# Altium PCB Kilobot_Controller_PCB.PcbDoc
Units mm, origin at the board's own origin, x right, y up, seen from the top; angles counter-clockwise.
Board outline 86 x 86 mm, 2 copper layers (Top Layer, Bottom Layer); 142 components, 92 nets, 429 pads, 149 vias.
Unrouted connection lines stored in the file: 1.
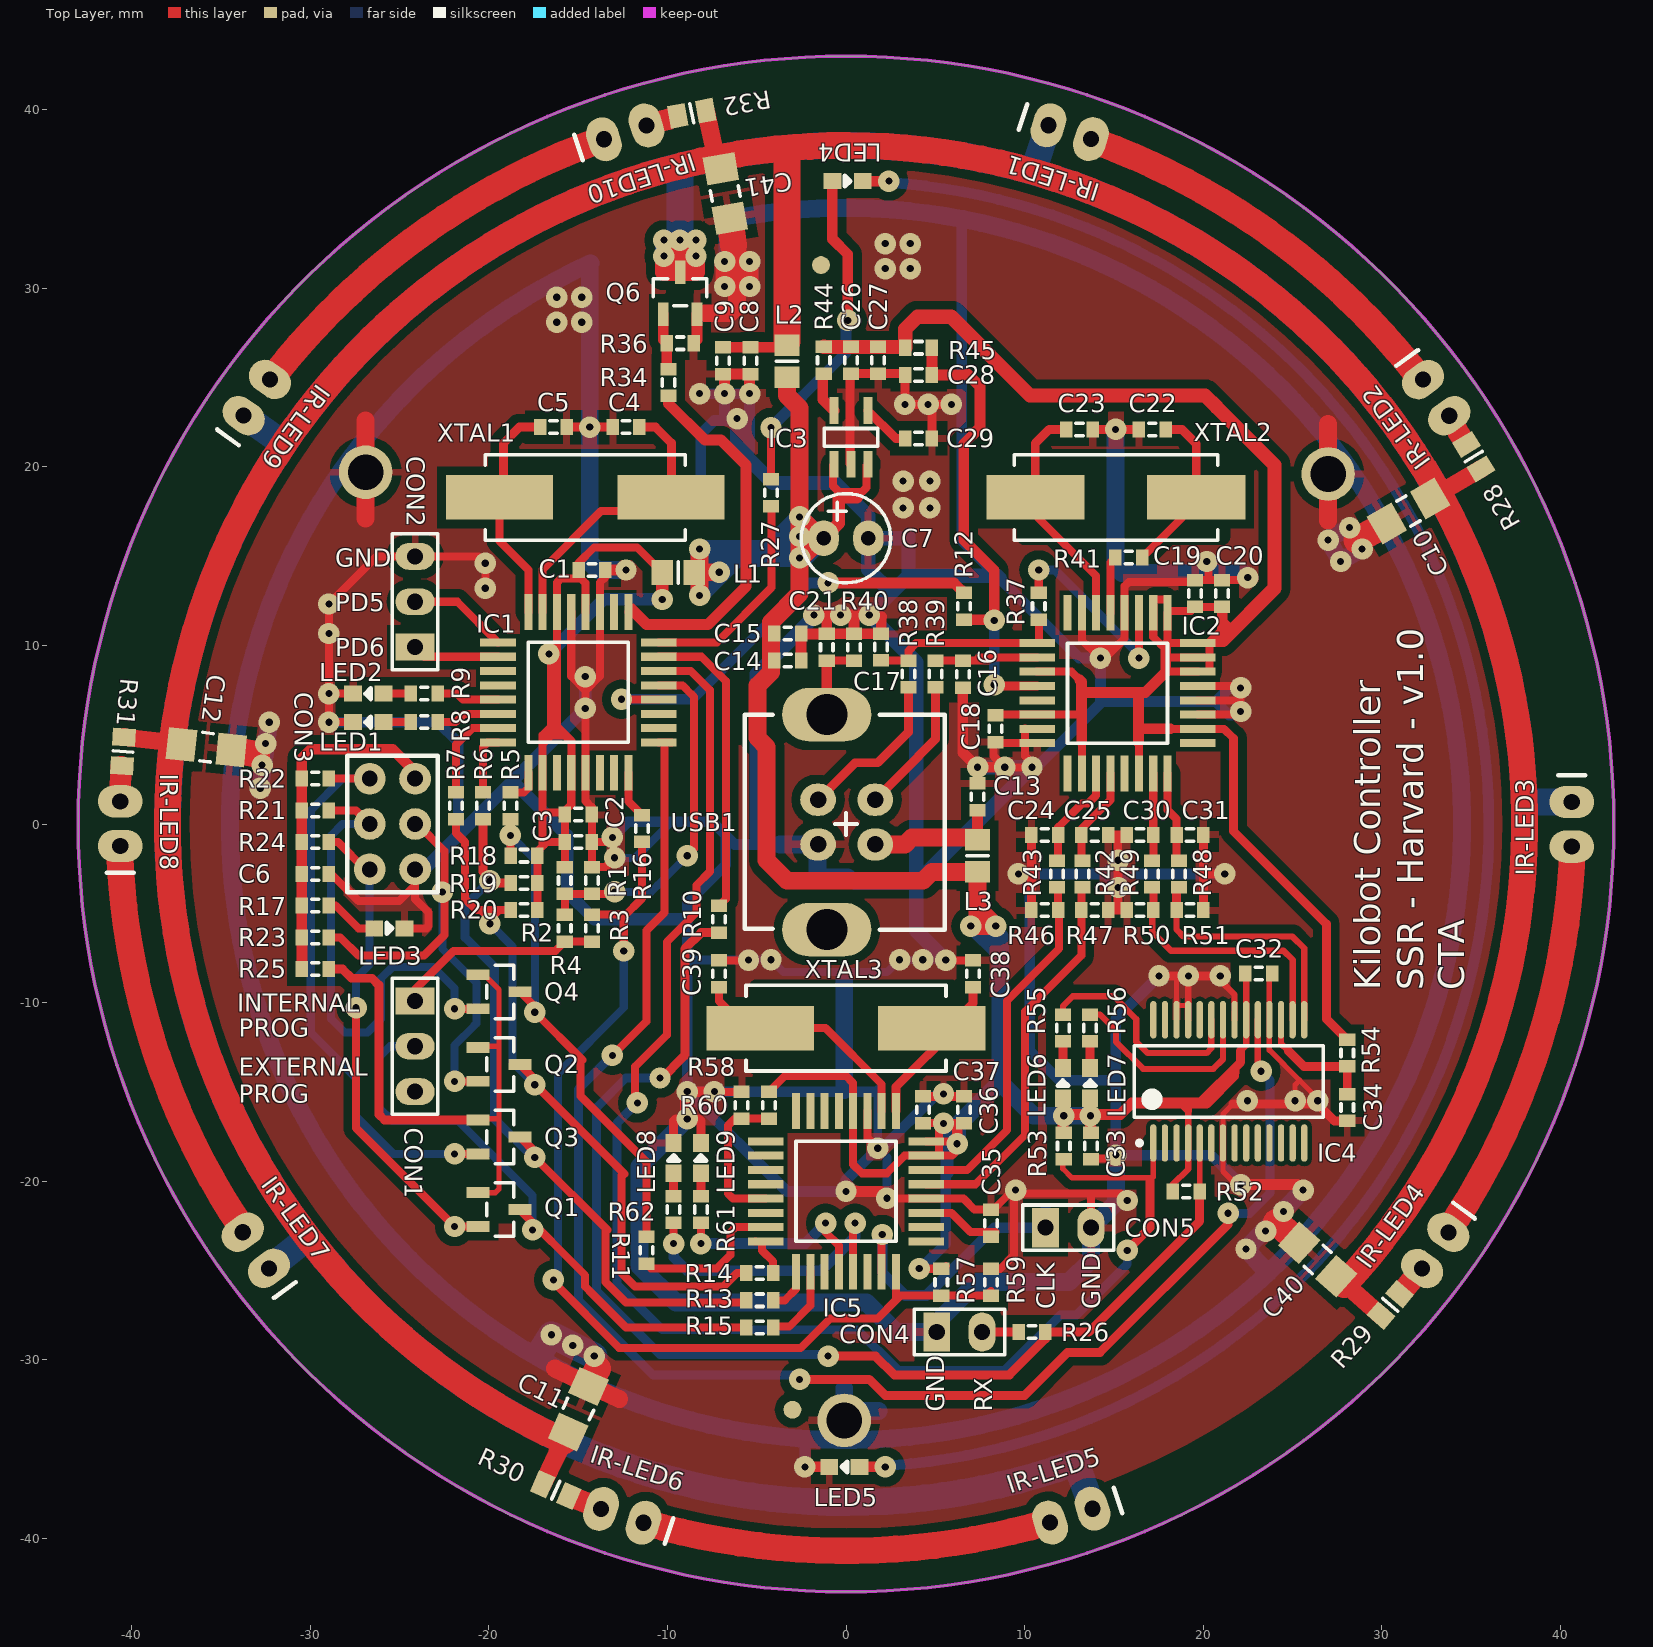
[diagram p0: Top Layer view]
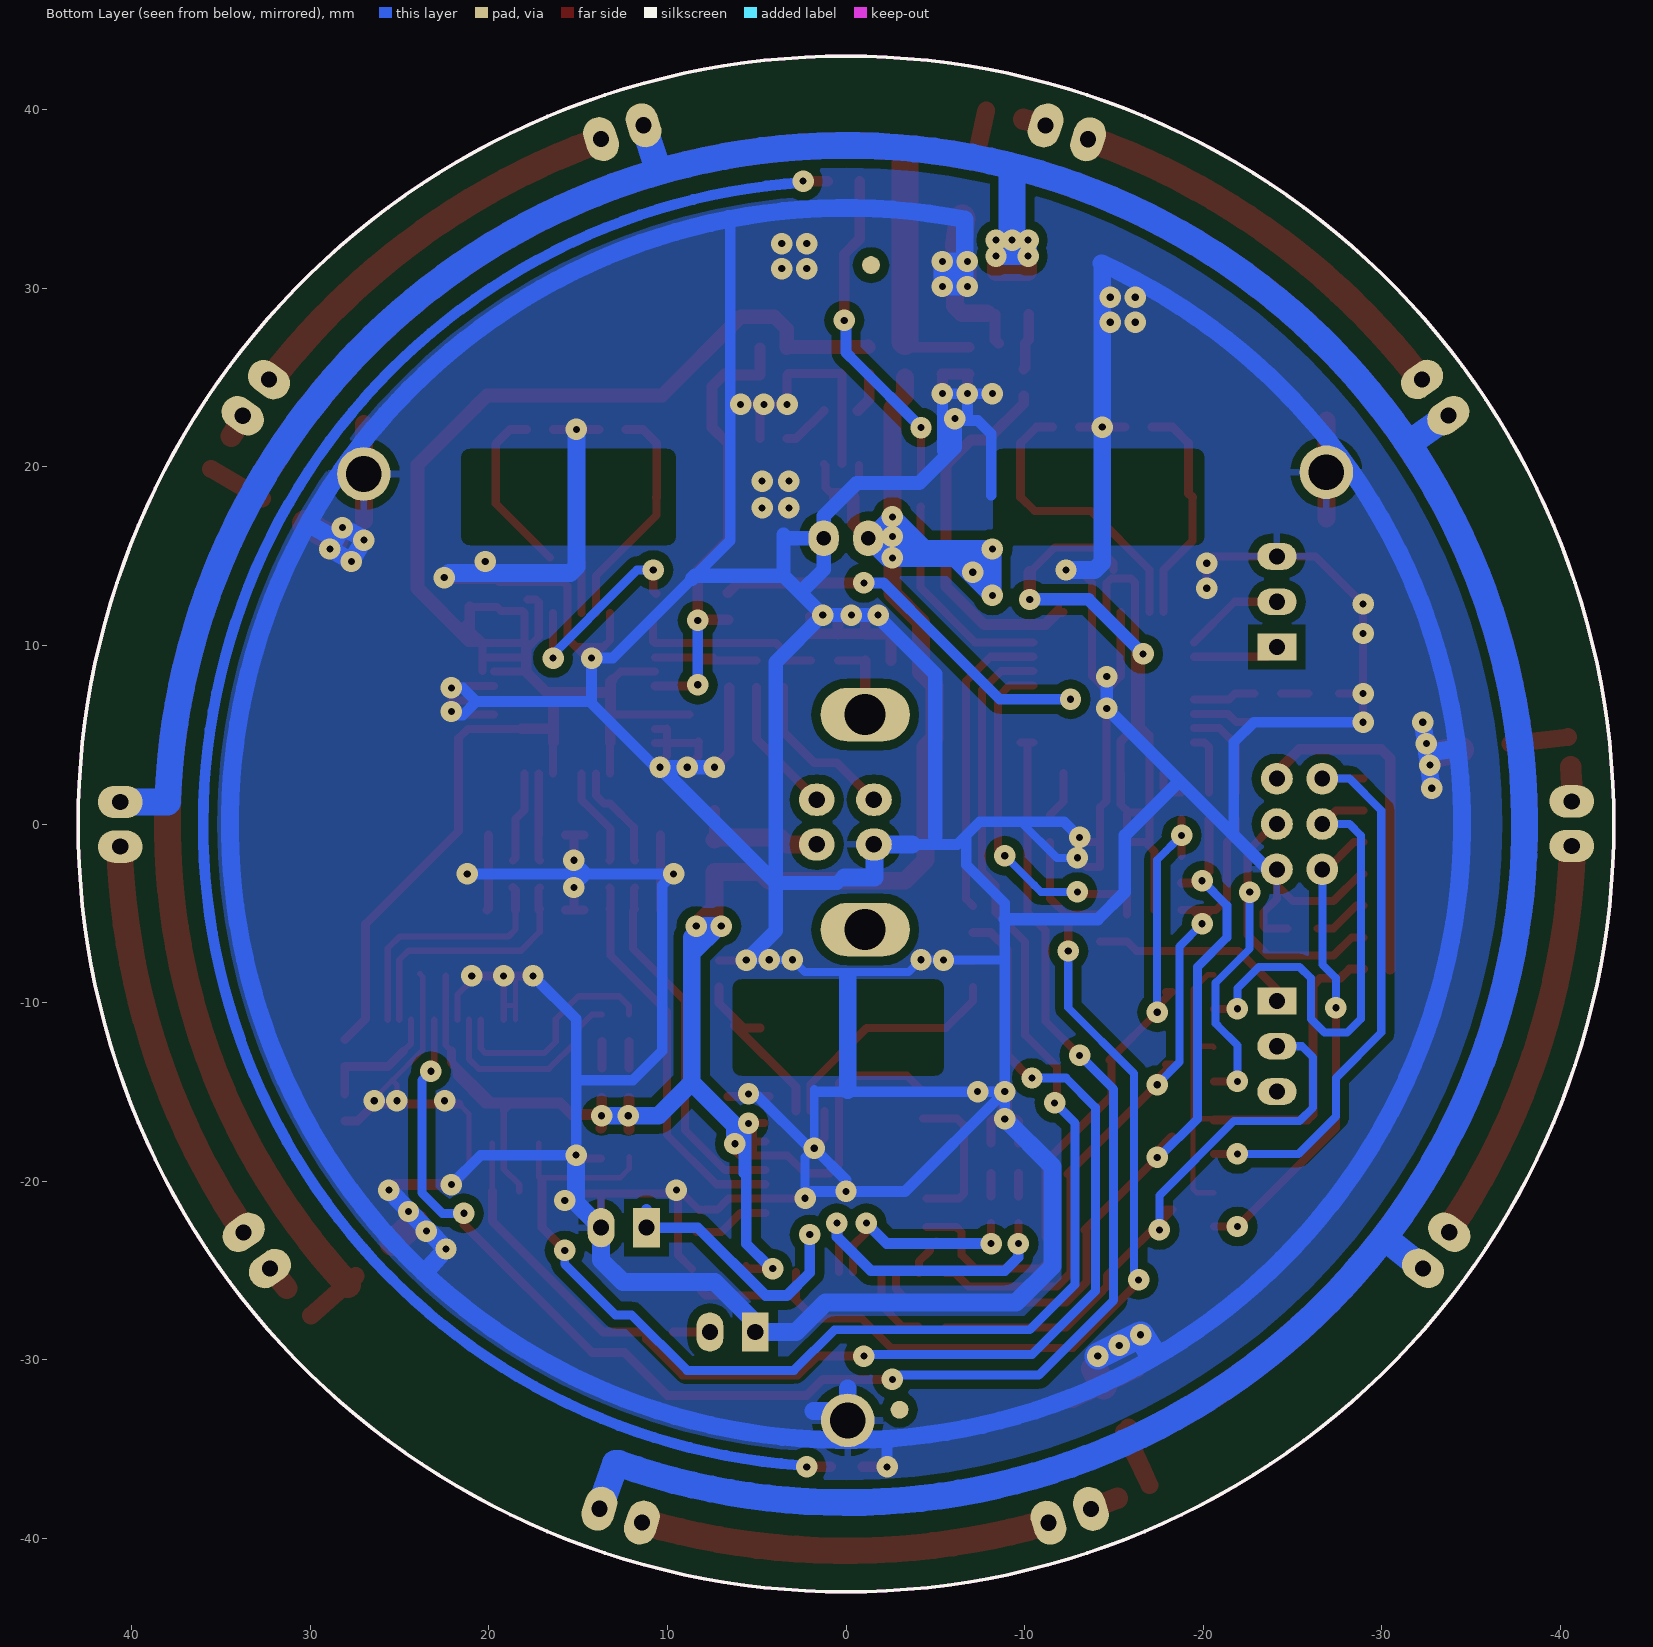
[diagram p1: Bottom Layer view, seen from below]

## Layer stack, top to bottom
Top Layer: signal copper 0.0356
Dielectric: dielectric 0.32, FR-4, Dk 4.8
Bottom Layer: signal copper 0.0356

## Board outline
-43,0 ccw(c0,0) 0,-43 ccw(c0,0) 43,0 ccw(c0,0) 0,43 ccw(c0,0)

## Design rules (kind name [scope] priority, off if disabled: settings)
Clearance ICs [(InComponent('IC1')) or (InComponent('IC2')) or (InComponent('IC3')) or (InComponent('IC4')) or (InComponent('IC5'))] p1: gap=0.25
Clearance [All] p2: gap=0.3
ComponentClearance [All] p1: gap=0 collisioncheckmode=3 verticalgap=0 showdistances=FALSE
MinimumSolderMaskSliver [All] p1: minsoldermaskwidth=0.05
PlaneConnect [All] p1: planeconnectstyle=Relief reliefexpansion=0.508 reliefentries=4 reliefconductorwidth=0.4 reliefairgap=0.254
PolygonConnect Via [IsVia] p1: connectstyle=Direct reliefconductorwidth=0.254 reliefentries=4 polygonreliefangle="90 Angle"
PolygonConnect [All] p2: connectstyle=Relief reliefconductorwidth=0.4 reliefentries=4 polygonreliefangle="90 Angle"
RoutingVias [All] p1: holewidth=0.5 width=1.27 viastyle="Through Hole" minholewidth=0.5 minwidth=1.27 maxholewidth=0.5 maxwidth=1.27
SilkToSilkClearance [All] p1: silktosilkclearance=0
SilkscreenOverComponentPads [All] p1: minsilkscreentomaskgap=0
SolderMaskExpansion Via_1 [IsVia] p1: expansion=-0.75
SolderMaskExpansion [All] p2: expansion=0.102
Width [All] p1: maxlimit=4 minlimit=0.254 preferedwidth=0.3
23 further rules are at their usual default settings.

## Classes and differential pairs
component class Kilobot_Controller_CPU: C1 C2 C3 C4 C5 C6 CON1 CON2 CON3 CON4 IC1 L1 LED1 LED2 LED3 Q1 Q2 Q3 Q4 R1 R2 R3 R4 R5 R6 R7 R8 R9 R10 R11 R12 R13 R14 R15 R16 R17 R18 R19 R20 R21 R22 R23 R24 R25 R26 XTAL1
component class Kilobot_Controller_Hub&FTDI: C13 C14 C15 C16 C17 C18 C19 C20 C21 C22 C23 C24 C25 C26 C27 C28 C29 C30 C31 C32 C33 C34 IC2 IC3 IC4 L3 L4 LED6 LED7 R37 R38 R39 R40 R41 R42 R43 R44 R45 R46 R47 R48 R49 R50 R51 R52 R53 R54 R55 R56 USB1 XTAL2
component class Kilobot_Controller_IR: C7 C8 C9 C10 C11 C12 C40 C41 IR-LED1 IR-LED2 IR-LED3 IR-LED4 IR-LED5 IR-LED6 IR-LED7 IR-LED8 IR-LED9 IR-LED10 L2 LED4 LED5 Q6 R26 R27 R29 R30 R31 R32 R34 R36
component class Kilobot_Controller_ISP: C35 C36 C37 C38 C39 CON5 IC5 LED8 LED9 R57 R58 R59 R60 R61 R62 XTAL3

## Components (designator, comment, footprint, x,y, rotation, side; value= is the part's Value field where it differs from the comment)
C1 "C0603" RESC1608L -14.224,14.224 r0 top
C2 "C0603" RESC1608L -14.986,0.52 r0 top
C3 "C0603" RESC1608L -14.986,-1.004 r180 top
C4 "C0603" RESC1608L -12.319,22.225 r0 top
C5 "C0603" RESC1608L -16.383,22.225 r180 top
C6 "C0603" RESC1608L -29.718,-2.794 r0 top
C7 "Aluminum" cap5mm 0,16.002 r0 top
C8 "C0603" RESC1608L -5.358,25.944 r270 top
C9 "C0603" RESC1608L -6.882,25.944 r90 top
C10 "Ceramic" 8RB-1206 31.496,17.526 r30 top
C11 "Ceramic" 8RB-1206 -14.986,-32.766 r246 top
C12 "Ceramic" 8RB-1206 -35.814,4.3 r174 top
C13 "C0603" RESC1608L 7.366,1.524 r270 top
C14 "C0603" RESC1608L -3.264,9.144 r0 top
C15 "C0603" RESC1608L -3.264,10.668 r180 top
C16 "C0603" RESC1608L 6.542,8.382 r90 top
C17 "C0603" RESC1608L 1.97,9.906 r270 top
C18 "C0603" RESC1608L 8.382,5.334 r90 top
C19 "C0603" RESC1608L 19.543,12.912 r270 top
C20 "C0603" RESC1608L 21.067,12.912 r270 top
C21 "C0603" RESC1608L -1.078,9.894 r90 top
C22 "C0603" RESC1608L 17.145,22.098 r0 top
C23 "C0603" RESC1608L 13.081,22.098 r180 top
C24 "C0603" RESC1608L 11.133,-0.604 r0 top
C25 "C0603" RESC1608L 13.927,-0.604 r180 top
C26 "C0603" RESC1608L 0.278,25.966 r90 top
C27 "C0603" RESC1608L 1.802,25.966 r90 top
C28 "C0603" RESC1608L 4.064,25.146 r0 top
C29 "C0603" RESC1608L 4.064,21.59 r0 top
C30 "C0603" RESC1608L 16.467,-0.604 r0 top
C31 "C0603" RESC1608L 19.261,-0.604 r180 top
C32 "C0603" RESC1608L 23.114,-8.382 r0 top
C33 "C0603" RESC1608L 13.716,-18.034 r90 top
C34 "C0603" RESC1608L 28.067,-15.875 r270 top
C35 "C0603" RESC1608L 8.128,-22.352 r270 top
C36 "C0603" RESC1608L 6.604,-16.002 r90 top
C37 "C0603" RESC1608L 4.318,-16.002 r270 top
C38 "C0603" RESC1608L 7.112,-8.382 r270 top
C39 "C0603" RESC1608L -7.112,-8.382 r270 top
C40 "Ceramic" 8RB-1206 26.416,-24.384 r318 top
C41 "Ceramic" 8RB-1206 -6.758,35.306 r100 top
CON1 "Jumper3" HDR1X3 -24.13,-9.906 r270 top
CON2 "Free pins" HDR1X3 -24.13,9.906 r90 top
CON3 "Rescue programming of kilobots" Programming -26.67,-2.54 r90 top
CON4 "Kilobot_Debug_Header" HDR1X2 5.08,-28.448 r0 top
CON5 "Header 2" HDR1X2 11.176,-22.606 r0 top
IC1 "Atmega328-SMD" TQFP32 -14.986,7.366 r270 top
IC2 "TUSB2036" TQFP32 15.205,7.328 r0 top
IC3 "TC2185" SOT23-5 0.278,21.648 r0 top
IC4 "IC_FT232RL" SSOP-28 21.435,-14.413 r90 top
IC5 "AT90USB162" TQFP32 0,-20.574 r270 top
IR-LED1 "IR-LED" IR-LED 13.716,38.354 r162 top
IR-LED2 "IR-LED" IR-LED 33.782,22.86 r126 top
IR-LED3 "IR-LED" IR-LED 40.64,-1.27 r90 top
IR-LED4 "IR-LED" IR-LED 32.258,-24.892 r54 top
IR-LED5 "IR-LED" IR-LED 11.43,-39.116 r18 top
IR-LED6 "IR-LED" IR-LED -13.716,-38.354 r342 top
IR-LED7 "IR-LED" IR-LED -33.782,-22.86 r306 top
IR-LED8 "IR-LED" IR-LED -40.64,1.27 r270 top
IR-LED9 "IR-LED" IR-LED -32.258,24.892 r234 top
IR-LED10 "IR-LED" IR-LED -11.176,39.116 r198 top
L1 "Ferrit" RESC2012N -9.398,14.097 r0 top
L2 "Ferrit" RESC2012N -3.302,25.908 r90 top
L3 "Ferrit" RESC2012N 7.366,-1.778 r270 top
LED1 "LED" LED0603 -25.908,5.7 r180 top
LED2 "LED" LED0603 -25.908,7.3 r180 top
LED3 "LED" LED0603 -26.416,-5.842 r0 top
LED4 "LED" LED0603 -0.762,36 r0 top
LED5 "LED" LED0603 0.762,-36 r180 top
LED6 "LED" LED0603 12.147,-15.361 r90 top
LED7 "LED" LED0603 13.671,-15.361 r90 top
LED8 "LED" LED0603 -9.652,-19.558 r90 top
LED9 "LED" LED0603 -8.128,-19.558 r90 top
Q1 "NMOS23" sot23-3 -19.431,-21.59 r0 top
Q2 "NMOS23" sot23-3 -19.431,-13.462 r0 top
Q3 "NMOS23" sot23-3 -19.431,-17.526 r0 top
Q4 "NMOS23" sot23-3 -19.431,-9.398 r0 top
Q6 "NMOS23" sot23-3 -9.288,29.716 r90 top
R1 "Res1" RESC1608L -14.224,-3.163 r90 top
R2 "Res1" RESC1608L -15.748,-3.163 r270 top
R3 "Res1" RESC1608L -14.224,-5.83 r90 top
R4 "Res1" RESC1608L -15.748,-5.83 r270 top
R5 "Res1" RESC1608L -18.796,1.016 r270 top
R6 "Res1" RESC1608L -20.32,1.016 r270 top
R7 "Res1" RESC1608L -21.844,1.016 r270 top
R8 "Res1" RESC1608L -23.622,5.7 r0 top
R9 "Res1" RESC1608L -23.622,7.3 r0 top
R10 "Res1" RESC1608L -7.112,-5.334 r270 top
R11 "Res1" RESC1608L -11.176,-23.876 r270 top
R12 "Res1" RESC1608L 6.604,12.192 r270 top
R13 "Res1" RESC1608L -4.826,-26.67 r0 top
R14 "Res1" RESC1608L -4.826,-25.146 r0 top
R15 "Res1" RESC1608L -4.826,-28.194 r0 top
R16 "Res1" RESC1608L -11.43,-0.254 r270 top
R17 "Res1" RESC1608L -29.718,-4.572 r0 top
R18 "Res1" RESC1608L -18.034,-1.778 r0 top
R19 "Res1" RESC1608L -18.034,-3.302 r0 top
R20 "Res1" RESC1608L -18.034,-4.826 r0 top
R21 "Res1" RESC1608L -29.718,0.762 r180 top
R22 "Res1" RESC1608L -29.718,2.54 r180 top
R23 "Res1" RESC1608L -29.718,-6.35 r180 top
R24 "Res1" RESC1608L -29.718,-1.016 r180 top
R25 "Res1" RESC1608L -29.718,-8.128 r0 top
R26 "Res1" RESC1608L 10.414,-28.448 r0 top
R27 "Res1" RESC1608L -4.2,18.542 r270 top
R28 "Res1" RESC2012L 35.152,20.574 r301 top
R29 "Res1" RESC2012L 30.48,-26.924 r229 top
R30 "Res1" RESC2012L -16.256,-37.3 r156 top
R31 "Res1" RESC2012L -40.486,4.064 r86 top
R32 "Res1" RESC2012L -8.636,39.8 r11 top
R34 "Res1" RESC1608L -9.95,24.724 r270 top
R36 "Res1" RESC1608L -9.288,26.922 r180 top
R37 "Res1" RESC1608L 10.795,12.192 r270 top
R38 "Res1" RESC1608L 3.494,8.394 r270 top
R39 "Res1" RESC1608L 5.018,8.394 r270 top
R40 "Res1" RESC1608L 0.446,9.894 r90 top
R41 "Res1" RESC1608L 15.835,14.922 r0 top
R42 "Res1" RESC1608L 13.247,-2.794 r90 top
R43 "Res1" RESC1608L 11.811,-2.794 r90 top
R44 "Res1" RESC1608L -1.246,25.966 r270 top
R45 "Res1" RESC1608L 4.064,26.67 r180 top
R46 "Res1" RESC1608L 11.133,-4.826 r180 top
R47 "Res1" RESC1608L 13.927,-4.826 r0 top
R48 "Res1" RESC1608L 18.647,-2.794 r90 top
R49 "Res1" RESC1608L 17.145,-2.794 r90 top
R50 "Res1" RESC1608L 16.467,-4.826 r180 top
R51 "Res1" RESC1608L 19.261,-4.826 r0 top
R52 "Res1" RESC1608L 19.05,-20.574 r180 top
R53 "Res1" RESC1608L 12.192,-18.034 r90 top
R54 "Res1" RESC1608L 28.067,-12.827 r90 top
R55 "Res1" RESC1608L 12.147,-11.424 r270 top
R56 "Res1" RESC1608L 13.671,-11.424 r270 top
R57 "Res1" RESC1608L 5.334,-25.654 r270 top
R58 "Res1" RESC1608L -4.318,-15.748 r270 top
R59 "Res1" RESC1608L 8.128,-25.654 r90 top
R60 "Res1" RESC1608L -5.842,-15.748 r90 top
R61 "Res1" RESC1608L -8.128,-21.59 r270 top
R62 "Res1" RESC1608L -9.652,-21.59 r270 top
USB1 "USB" USB_VERTICAL 0.635,0.127 r0 top
XTAL1 "Crystal" crystal-hc49 -14.605,18.288 r0 top
XTAL2 "CrystalSMD" CrystalSMD 15.113,18.288 r0 top
XTAL3 "Crystal" crystal-hc49 0,-11.43 r0 top

## Footprints (in the part's own frame and the unit in brackets; to place one, negate y for a bottom-side part, rotate by r counter-clockwise, add the part's x,y. Pads: shape width x height; smd on the part's side, far side on the other; paste and mask are expansions set on the pad)
8RB-1206 [mm] "Chip Resistor; Body 3.2 x 1.6 mm (LxW typ)"
  rect 1.6x1.8 smd: 1(-1.4,0) 2(1.4,0)
  silkscreen extent -0.3,-0.8 0.3,0.8
cap5mm [mm]
  oval 1.7x2 hole 0.8: 1(-1.25,0) 2(1.25,0)
  silkscreen extent -2.5,-2.5 2.5,2.5
crystal-hc49 [mm]
  rect 6x2.5 smd: 1(-4.8,0) 2(4.8,0)
  silkscreen extent -5.6,-2.4 5.6,2.4
CrystalSMD [mm]
  rect 5.5x2.5 smd: 1(-4.5,0) 2(4.5,0)
  silkscreen extent -5.7,-2.4 5.7,2.4
HDR1X2 [mm] "Connector; Header; 2 Position"
  rect 1.5x2.2 hole 0.9: 1(0,0)
  oval 1.5x2.2 hole 0.9: 2(2.54,0)
  silkscreen extent -1.27,-1.27 3.81,1.27
HDR1X3 [mm] "Connector; Header; 3 Position"
  rect 1.5x2.2 hole 0.9: 1(0,0)
  oval 1.5x2.2 hole 0.9: 2(2.54,0) 3(5.08,0)
  silkscreen extent -1.27,-1.27 6.35,1.27
IR-LED [mm]
  oval 1.8x2.5 hole 0.9: 1(0,0) 2(2.5,0)
  silkscreen extent 4,-0.75 4,0.75
LED0603 [mm]
  rect 1x0.9 smd: 1(0,0) 2(1.7,0)
  silkscreen extent 0.7,-0.3 1,0.3
Programming [mil]
  round 70 hole 35: 1(0,0) 2(100,0) 3(200,0) 4(200,-100) 5(100,-100) 6(0,-100)
  silkscreen extent -50,-150 250,50
RESC1608L [mm] "Chip Resistor, Body 1.6x0.8mm, IPC High Density"
  rect 0.7x0.9 smd: 1(-0.75,0) 2(0.75,0)
  silkscreen extent -0.2,-0.35 0.2,0.35, body extent -0.85,-0.48 0.85,0.48, height 0.9
RESC2012L [mm] "Chip Resistor, Body 2.0x1.3mm, IPC High Density"
  rect 1x1.3 smd: 1(-0.8,0) 2(0.8,0)
  silkscreen extent 0,-0.55 0,0.55, body extent -1.07,-0.7 1.07,0.7, height 2.54
RESC2012N [mm] "Chip Resistor, Body 2.0x1.2mm, IPC Medium Density"
  rect 1.2x1.4 smd: 1(-0.9,0) 2(0.9,0)
  silkscreen extent 0,-0.6 0,0.6, body extent -1.07,-0.7 1.07,0.7, height 0.7
sot23-3 [mm]
  rect 1.3x0.6 smd: 1(-1.173,0.95) 2(-1.173,-0.95) 3(1.177,0)
  silkscreen extent -0.7,-1.5 0.83,1.5
SOT23-5 [mm]
  rect 0.5x1.5 smd: 1(-0.95,-1.5) 2(0,-1.5) 3(0.95,-1.5) 4(0.95,1.5) 5(-0.95,1.5)
  silkscreen extent -1.5,-0.5 1.5,0.5
SSOP-28 [mm] "28-Pin SSOP 0.65 mm Pitch"
  oval 2.1x0.35 smd: 1(-3.45,4.225) 2(-3.45,3.575) 3(-3.45,2.925) 4(-3.45,2.275) 5(-3.45,1.625) 6(-3.45,0.975) 7(-3.45,0.325) 8(-3.45,-0.325) 9(-3.45,-0.975) 10(-3.45,-1.625) 11(-3.45,-2.275) 12(-3.45,-2.925) 13(-3.45,-3.575) 14(-3.45,-4.225) 15(3.45,-4.225) 16(3.45,-3.575) 17(3.45,-2.925) 18(3.45,-2.275) 19(3.45,-1.625) 20(3.45,-0.975) 21(3.45,-0.325) 22(3.45,0.325) 23(3.45,0.975) 24(3.45,1.625) 25(3.45,2.275) 26(3.45,2.925) 27(3.45,3.575) 28(3.45,4.225)
  silkscreen extent -3.57,-5.3 2,5.3, body extent -2.7,-5.3 2.7,5.3, height 2
TQFP32 [mm]
  rect 2x0.45 smd: 1(-4.5,2.8) 2(-4.5,2) 3(-4.5,1.2) 4(-4.5,0.4) 5(-4.5,-0.4) 6(-4.5,-1.2) 7(-4.5,-2) 8(-4.5,-2.8) 17(4.5,-2.8) 18(4.5,-2) 19(4.5,-1.2) 20(4.5,-0.4) 21(4.5,0.4) 22(4.5,1.2) 23(4.5,2) 24(4.5,2.8)
  rect 0.45x2 smd: 9(-2.8,-4.5) 10(-2,-4.5) 11(-1.2,-4.5) 12(-0.4,-4.5) 13(0.4,-4.5) 14(1.2,-4.5) 15(2,-4.5) 16(2.8,-4.5) 25(2.8,4.5) 26(2,4.5) 27(1.2,4.5) 28(0.4,4.5) 29(-0.4,4.5) 30(-1.2,4.5) 31(-2,4.5) 32(-2.8,4.5)
  round 1 on Top Overlay: 33(-2,2)
  silkscreen extent -2.8,-2.8 2.8,2.8
USB_VERTICAL [mm]
  oval 2x1.8 hole 0.92: 1(1,-1.27) 2(1,1.23) 3(-2.2,1.23) 4(-2.2,-1.27)
  oval 5x3 hole 2.3: 5(-1.71,-6.04) 5(-1.71,6)
  silkscreen extent -6.31,-6.04 4.89,6

## Part data
C1 C2 C3 C4 C5 C6 C8 C9 C13 C14 C15 C16 C17 C18 C19 C20 C21 C22 C23 C24 C25 C26 C27 C28 C29 C30 C31 C32 C33 C34 C35 C36 C37 C38 C39: "Ceramic Chip Capacitor - Standard"
C7: library part CAP
C10 C11 C12 C40 C41: library part CAP2220
CON2: library part "Header 3", "Header, 3-Pin"
CON3: library part "Programming con new symbol"
CON5: "Header, 2-Pin"
IC4: "FT232R USB UART"
L1 L2 L3: library part Inductor, "Inductor"
R1 R2 R3 R4 R5 R6 R7 R8 R9 R10 R11 R12 R13 R14 R15 R16 R17 R18 R19 R20 R21 R22 R23 R24 R25 R26 R27 R28 R29 R30 R31 R32 R34 R36 R37 R38 R39 R40 R41 R42 R43 R44 R45 R46 R47 R48 R49 R50 R51 R52 R53 R54 R55 R56 R57 R58 R59 R60 R61 R62: "Resistor"

## Free pads (board coordinates)
  round 1 on Top Overlay: 0(-26.67,-4.699)
  round 2 on Top Solder: 0(-3,-32.8) 0(-1.4,31.3)
  round 1 all layers, no hole: 3(-3,-32.8) 3(-1.4,31.3)
  round 3 hole 2: 24(-26.9,19.7) 24(-0.1,-33.4) 24(27,19.6)

## Via types
v1: diameter 1.2, hole 0.4, Top Layer to Bottom Layer, 149 vias

## Nets (pads, with @x,y where several pads share a name; then routed paths per layer and width w, separated by ;. In a path a pad name is that pad's centre, name@x,y a point inside that pad or via, vN(x,y) a via of type N, cw(c..) or ccw(c..) an arc to the next point about the centre after c; other vN are vias at no path point)
+3V3: C18.2 C19.2 C20.2 C26.2 C27.2 IC2.3 IC2.6 IC2.10 IC2.14 IC2.18 IC2.22 IC2.23 IC2.24 IC2.25 IC2.26 R44.1 R45.2 R54.2 | length 115.3
  Top Layer w0.45: C18.2@8.763,6.128 IC2.6 13.097,6.128 13.097,7.366 ; IC2.3 12.629,8.528 13.097,8.06 13.097,7.366 ; IC2.10 13.205,4.569 13.208,4.572 ; 13.335,7.366 13.097,7.366 ; 16.383,4.572 16.405,4.55 IC2.14 ; IC2.25@17.847,12.56 17.347,12.56 17.205,12.418 IC2.26 17.205,10.481 17.653,10.033 17.907,10.033 ; 17.907,8.509 17.926,8.528 IC2.22 ; 17.907,9.398 17.977,9.328 IC2.23 20.329,9.328 IC2.23@20.347,9.31 ; 18.161,5.334 18.167,5.328 IC2.18 21.172,5.328 21.7,4.8 ; IC2.22@20.347,8.56 20.347,10.128 IC2.24 ; 20.847,10.31 20.665,10.128 IC2.24 ; 21.067,10.9 20.295,10.128 IC2.24 ; C20.2 C19.2 19.319,11.938 18.115,11.938 IC2.25 18.005,10.131 17.907,10.033 ; 17.907,10.033 18.002,10.128 IC2.24
  Top Layer w0.5: 21.7,4.8 21.7,-0.4 26.9,-5.6 26.9,-10.91 R54.2
  Top Layer w0.6: 13.097,8.06 13.208,7.949 13.208,4.572 ; 13.335,7.366 16.383,7.366 ; 16.383,4.572 16.383,5.461 ; 17.907,10.033 17.907,8.509 16.764,7.366 16.383,7.366 ; 18.161,5.334 16.51,5.334 16.383,5.461 ; 20.847,10.31 21.067,10.53 21.067,11.333 ; C20.2 21.067,11.333 ; 21.6,10.8 21.067,11.333 ; 16.383,5.461 16.383,7.366
  Top Layer w0.8: R44.1@-1.234,26.728 R44.1 3.268,26.716 R45.2 3.314,27.714 4,28.4 5.9,28.4 10.3,24 20.1,24 ; 20.768,23.332 20.1,24 ; 20.847,10.31 21.11,10.31 24,13.2 24,20.1 20.1,24
CPU_MISO: IC5.17 R13.2 | length 2.5
  Top Layer w0.45: R13.2 -3.429,-26.67 -2.8,-26.041 IC5.17
CPU_MOSI: IC5.16 R14.2 | length 1.8
  Top Layer w0.45: IC5.16@-5.08,-23.368 IC5.16@-5.074,-23.374 ; -4.699,-23.622 -4.699,-23.876 -4.076,-24.499 R14.2
CPU_RESET: IC5.18 R15.2 | length 4.5
  Top Layer w0.45: R15.2 -4.032,-28.15 -3.182,-28.15 -2,-26.968 IC5.18
CPU_SCK: IC5.15 R11.2 | length 8.5
  Top Layer w0.45: R11.2 -10.91,-24.892 -7.239,-24.892 -6.477,-24.13 -6.477,-22.86 -6.191,-22.574 IC5.15
DEBUG_1: IC1.14 R8.2 | length 3.6
  Top Layer w0.45: R8.2 -21.859,5.7 -21.393,6.166 -21.139,6.166 IC1.14
DEBUG_2: IC1.13 R9.2 | length 3.5
  Top Layer w0.45: R9.2 -21.778,7.3 -21.444,6.966 IC1.13
DM1: IC5.30 R43.1 R46.1 | length 20.4
  Top Layer w0.45: IC5.30 6.788,-19.374 9.017,-17.145 9.017,-9.9 11.938,-6.979 11.938,-5.842 11.938,-4.881 R46.1@11.811,-4.754 ; R43.1 11.883,-3.616 R46.1
DM2: IC4.16 R49.1 R50.1 | length 14.6
  Top Layer w0.35: R50.1@17.145,-4.754 17.145,-6.045 18.2,-7.1 24.5,-7.1 25.01,-7.61 IC4.16
  Top Layer w0.45: R50.1@17.145,-4.754 R50.1 17.217,-3.616 R49.1
DP1: IC5.29 R42.1 R47.1 | length 22
  Top Layer w0.45: IC5.29 7.258,-20.174 10.033,-17.399 10.033,-10.5 13.177,-7.356 13.177,-5.938 R47.1 ; R47.1@13.247,-4.756 R47.1 ; R42.1 13.177,-3.614 R47.1
DP2: IC4.15 R48.1 R51.1 | length 14
  Top Layer w0.35: R51.1 18.511,-5.911 18.9,-6.3 25,-6.3 25.66,-6.96 IC4.15
  Top Layer w0.5: R51.1 18.511,-3.68 R48.1
GND: C1.2 C2.2 C3.1 C4.1 C5.1 C6.2 C7.2 C8.2 C9.1 C10.1 C11.1 C12.1 C13.1 C14.2 C15.1 C16.1 C17.1 C18.1 C19.1 C20.1 C21.2 C22.1 C23.1 C24.1 C25.1 C26.1 C27.1 C28.1 C29.2 C30.1 C31.1 C32.2 C33.1 C34.2 C35.1 C36.2 C37.1 C38.1 C39.1 C40.1 C41.1 CON2.3 CON3.6 CON4.1 CON5.2 IC1.3 IC1.5 IC1.21 IC2.7 IC2.8 IC2.19 IC2.20 IC2.21 IC2.28 IC2.31 IC3.2 IC4.7 IC4.18 IC4.21 IC4.25 IC4.26 IC5.3 IC5.28 LED1.2 LED2.2 LED3.2 LED5.2 LED8.2 LED9.2 pad.24 Q6.2 R1.2 R36.1 R40.2 R46.2 R47.2 R50.2 R51.2 R59.2 R60.2 USB1.4 | length 965.4
  Top Layer w0.3: v1(17.526,-8.509) 18.542,-8.509 18.51,-8.541 IC4.26 18.51,-10.192 18.542,-10.16 19.177,-10.16 19.16,-10.177 IC4.25 ; 21.657,-15.685 21.11,-16.232 IC4.7 21.11,-19.459 21.844,-20.193 v1(22.098,-20.193) ; C32.2@23.749,-8.497 C32.2 23.71,-8.536 IC4.18 23.71,-12.661 25.4,-14.351 ; v1@25.146,-15.685 25.146,-14.605 25.4,-14.351 ; v1@26.407,-15.685 26.407,-15.358 25.4,-14.351
  Top Layer w0.35: IC4.25 19.16,-8.526 v1(19.177,-8.509) ; v1(20.955,-8.509) 20.955,-8.763 21.76,-9.568 IC4.21
  Top Layer w0.45: C6.2 -28.829,-2.794 -27.305,-4.318 -25.019,-4.318 -24.13,-3.429 CON3.6 -24.13,-4.191 -23.368,-4.953 -23.368,-5.715 -23.495,-5.842 LED3.2 ; v1(-28.956,7.3) LED2.2 ; LED1.2 v1(-28.956,5.7) v1(-28.956,12.319) -26.289,14.986 CON2.3 -20.586,14.986 v1(-20.2,14.6) v1(-20.2,13.2) ; IC1.5 -15.386,8.274 -14.586,7.474 ; C3.1 -13.335,-1.004 v1(-13.081,-0.75) ; C2.2@-14.236,0.901 C2.2 ; C1.2 -13.474,13.831 -13.786,13.519 IC1.3 -13.786,8.274 -14.586,7.474 ; v1(-12.954,-1.893) -13.474,-2.413 R1.2 -14.236,-2.401 C2.2 ; v1(-7.366,-14.986) -7.354,-14.998 R60.2 ; C39.1 -5.473,-7.632 v1(-5.461,-7.62) ; IC5.3 1.2,-17.583 v1(1.778,-18.161) ; v1(2.286,-20.955) 2.305,-20.974 IC5.28 6.574,-20.974 7.2,-21.6 C35.1@7.888,-21.6 ; v1(5.588,-7.62) 5.6,-7.632 C38.1 ; C35.1 8.243,-21.602 9.144,-20.701 15.367,-20.701 v1(15.748,-21.082) ; C18.1@8.255,4.584 8.255,3.81 v1(8.89,3.175) 10.668,3.175 10.033,3.81 10.033,5.334 10.039,5.328 IC2.7 ; C18.1@8.311,4.528 IC2.8 ; 8.636,-24.904 9.4,-24.14 9.4,-20.801 v1@9.5,-20.701 ; IC2.31 13.205,10.29 13.589,9.906 ; CON5.2 13.716,-20.701 ; C33.1@13.716,-18.73 15.101,-18.73 v1(15.113,-18.542) ; 14.732,9.906 14.732,9.779 v1(14.246,9.293) ; IC2.19 22.066,6.128 22.098,6.096 v1(22.098,7.62) 21.99,7.728 IC2.21 ; IC2.20 22.041,6.928 22.098,6.985 ; v1(20.2,14.7) 20.3,14.6 20.3,13.662 ; v1(22.5,13.8) 22.362,13.662 C20.1 20.3,13.662 ; -14.586,7.474 IC1.21 -14.586,1.289 -14.236,0.939 C2.2 ; 13.589,9.906 13.633,9.906 v1(14.246,9.293) ; 13.589,9.906 15.113,9.906 ; v1(14.246,9.293) 14.5,9.293 15.113,9.906 ; 15.113,9.906 15.605,10.398 IC2.28 15.605,13.318 15.847,13.56 19.441,13.56 C19.1 20.3,13.662
  Top Layer w0.5: C5.1 C4.1 ; LED8.2 -9.652,-16.637 -9.525,-16.51 v1(-8.89,-16.51) -8.255,-16.51 -8.128,-16.637 LED9.2 ; IC3.2@0.229,20.197 0.229,25.167 C26.1 3.244,25.216 C28.1 3.3,25.132 v1(3.3,23.5) v1(5.9,23.5) ; C37.1 C36.2 ; v1(4.6,23.5) 4.814,23.286 C29.2 ; C18.1@8.255,4.584 C18.1@8.311,4.528 ; v1(9.652,-2.794) 10.383,-2.794 ; R46.2 C24.1 ; C23.1 C22.1 ; R47.2 R50.2 ; C25.1 C30.1 ; 15.113,-4.826 15.24,-4.699 v1(15.24,-3.556) 15.24,-0.604 ; v1(17.526,-8.509) v1(20.955,-8.509) ; 20.011,-2.794 v1(21.209,-2.794) ; C31.1 20.011,-4.726 R51.2@20.111,-4.826 ; 21.657,-15.685 26.407,-15.685 27.347,-16.625 C34.2
  Top Layer w0.6: C1.2 v1(-12.319,14.224) ; v1(-8.89,-14.986) v1(-7.366,-14.986) ; R36.1 -8.338,27.122 Q6.2 -7.9,28.6 ; v1(-6.8,24.1) -6.8,25.112 C9.1 C8.2 -5.4,25.152 v1(-5.4,24.1) ; C14.2 C15.1 -2.49,10.644 C21.2 ; v1(-2.3,-36) LED5.2 ; v1(-1.8,11.7) -1,11.7 ; C21.2@-1.102,10.668 C21.2 ; C21.2@-1.1,10.666 C21.2 ; v1(0,-20.574) 1.905,-20.574 v1(2.286,-20.955) ; 0.4,11.7 0.446,11.654 R40.2 R40.2@0.5,10.698 ; C17.1@2,10.686 C17.1 ; C16.1 6.542,3.999 v1(7.366,3.175) v1(8.89,3.175) ; v1(20.955,-8.509) v1@20.955,-8.255 ; v1(22.098,-20.193) v1@25.273,-20.193 ; C21.2 -1.078,11.622 -1,11.7 ; C21.2 -1.066,10.656 C17.1 ; -1,11.7 v1(1.3,11.7) 1.4,11.6 2,11.6 1.97,11.57 C17.1
  Top Layer w0.8: v1(-8.89,-16.51) v1(-8.89,-14.986)
  Top Layer w1: -26.9,17.1 -26.9,22.6 ; -16.3,-30.5 -12.7,-32.2 ; -7.9,28.6 -6.5,28.6 -6.1,29 -6.1,31.8 v1(-5.4,31.5) v1(-5.4,30.1) v1(-6.8,30.1) v1(-6.8,31.5) ; 27,17 27,22.4
  Top Layer w1.5: C12.1 -33,3.9 ; C11.1 -13.9,-30.5 ; C41.1 -6.3,32.4 ; 24.1,-22.3 C40.1 ; v1@28.6,15.9 C10.1
  Bottom Layer w0.45: v1(-12.954,-1.893) -12.942,-1.905 -11.811,-1.905 -9.779,0.127 ; v1(-7.366,-14.986) 1.651,-14.986 1.778,-14.859 ; v1@-5.441,-7.6 v1(-4.2,-7.6) -3.5,-8.3 -0.1,-8.3 ; -2.3,-34.6 -2.2,-34.5 ; 0,-14.986 -0.1,-14.886 -0.1,-8.3 ; v1(5.588,-7.62) 3.02,-7.62 v1(3,-7.6) 2.3,-8.3 -0.1,-8.3
  Bottom Layer w0.5: -8.89,-7.62 v1(-5.461,-7.62) ; 1.778,-14.859 v1(1.778,-18.161) 2.286,-18.669 v1(2.286,-20.955) ; 15.097,17.81 v1(15.097,22.098) ; 18.847,14.06 22.24,14.06 v1(22.5,13.8)
  Bottom Layer w0.6: v1(-28.956,5.7) -22.845,5.7 -21.717,4.572 -21.717,-0.635 -21.981,-0.899 ; -14.351,16.256 v1(-14.351,22.225) ; v1(-13.081,-0.75) -12.204,0.127 -7.493,0.127 -6.731,-0.635 ; v1(-8.89,-16.51) v1(-8.89,-14.986) ; v1(-8.2,24.1) v1(-6.8,24.1) ; -8.128,18.415 -8.128,21.844 -7.372,22.6 v1@-6.1,22.6 ; -6.8,22.6 v1(-6.8,24.1) ; -5.65,20.65 -5.4,20.9 v1(-5.4,24.1) v1(-6.8,24.1) ; v1(-2.3,-36) -2.3,-34.6 ; USB1.4 -6.223,-1.143 -6.731,-0.635 ; 1.651,-14.986 v1(-8.89,-14.986) ; v1(2.286,-20.955) 1.905,-20.574 v1(0,-20.574) ; v1@4.953,-15.24 2.032,-18.161 v1(1.778,-18.161) 0,-19.939 v1(0,-20.574) ; 6.7,33.8 6.477,33.577 6.477,15.875 13.059,9.293 v1(14.246,9.293) 14.246,6.963 14.351,6.858 ; v1@10.668,3.175 14.351,6.858 ; 14.7,-2.9 14.7,-3.016 v1(15.24,-3.556) 15.24,-2.8 ; v1(15.748,-21.082) 15.113,-20.447 v1(15.113,-18.542) ; v1(17.526,-8.509) 15.113,-10.922 15.113,-14.224 ; v1(21.209,-2.794) 21.203,-2.8 15.24,-2.8 ; v1(22.098,-20.193) 20.447,-18.542 v1(15.113,-18.542) ; v1@22.098,6.096 21.463,6.096 20.701,6.858 ; v1(22.098,7.62) 21.463,7.62 20.701,6.858 ; v1(-8.89,-14.986) -3.302,-20.574 v1(0,-20.574) ; v1(-8.89,-14.986) -8.89,-4.445 -6.731,-2.286 -6.731,-0.635 ; 14.351,6.858 20.701,6.858 ; v1(15.113,-18.542) 15.113,-14.224 ; 15.113,-14.224 14.986,-14.351 11.938,-14.351 10.287,-12.7 10.287,-3.429 v1(9.652,-2.794) 14.478,-2.794 v1(15.24,-2.032) 15.24,-2.8
  Bottom Layer w0.7: CON3.6 -23.622,-2.54 -18.669,2.413 ; v1(-14.605,8.255) v1(-14.605,6.477) -18.669,2.413 ; -8.89,-5.334 -14.097,-5.334 -15.621,-3.81 -15.621,-0.635 -18.669,2.413
  Bottom Layer w0.8: v1@-6.1,22.6 -6.1,21.1 -4.1,19.1 -0.6,19.1 1.25,17.25 C7.2 ; -5,-0.7 -5,8.4 -1.7,11.7 v1(1.3,11.7) ; 0.086,-2.886 0.5,-3.3 3.939,-3.3 ; 1.3,14.2 1.25,14.25 ; 2.6,13 2.5,13 1.25,14.25 ; v1(5.588,-7.62) 3.939,-5.971 3.939,-3.3 ; v1(7.366,3.175) v1(10.414,3.175) 3.939,-3.3 ; 8.626,13.726 8.452,13.9 3.5,13.9 ; 1.25,14.25 C7.2 ; C7.2 3.302,16.002 3.5,16.2 3.5,13.9 ; v1(1.3,11.7) 3.5,13.9 ; v1(1.3,11.7) 3.939,9.061 3.939,-3.3
  Bottom Layer w1: -34,4.2 -32.534,3.972 v1(-32.7,3.3) ; v1(-32.8,2) v1(-32.3,5.7) ; v1(-12.319,14.224) -13.924,14.224 -14.351,14.651 v1(-14.351,22.225) -14.351,31.345 -14.299,31.397 ccw(c0,0) -6.65,33.853 -6.65,30.25 v1(-5.4,31.5) ; v1(-8.89,-16.51) -11.557,-19.177 -11.557,-24.765 -9.525,-26.797 1.143,-26.797 2.794,-28.448 CON4.1 5.08,-27.92 7.346,-25.654 12.485,-25.654 13.716,-24.423 CON5.2 15.113,-21.209 v1(15.113,-18.542) ; -3.7,-1.143 USB1.4 -1.6,-1.143 -1.6,-3 0.086,-3 ; -0.1,-31.6 -0.1,-33.4 -0.1,-32.861 1.827,-32.861 ; -0.1,-14.886 -0.1,-8.6 ; v1(15.097,22.098) 15.097,14.403 15.44,14.06 v1@22.24,14.06 ; 23.4,-24.9 v1(22.4,-23.8) v1(25.6,-20.5) ; v1(27,15.9) v1(27.7,14.7) v1(28.9,15.4) 28.573,15.96 ; v1@27,16 v1(28.2,16.6) 28.573,15.96 ; 30.1,16.8 28.573,15.96 ; v1(-5.4,30.1) v1(-6.8,31.5) v1(-5.4,31.5) ; v1(-5.4,30.1) v1(-5.4,31.5) ; v1(-5.4,30.1) v1(-6.8,30.1) v1(-5.4,31.5)
  Bottom Layer w1.5: -17,-29.4 v1(-16.5,-28.6) v1(-14.1,-29.8)
  other v1: -15.3,-29.2 23.5,-22.8 24.5,-21.7 9.5,-20.5 22.479,-15.494 25.146,-15.494 26.416,-15.494 5.461,-15.113 4.3,-7.6 -32.5,4.5 22.098,6.3 -28.956,10.668 -0.3,11.7 3.2,17.7 4.7,17.7 3.2,19.2 4.7,19.2 -6.1,22.7 -16.2,28.1 -14.8,28.1 -16.2,29.5 -14.8,29.5 2.2,31.1 3.6,31.1 2.2,32.5 3.6,32.5
H\U\B\_\R\E\S\E\T\: C28.2 IC2.4 R12.2 R45.1 | length 26.4
  Top Layer w0.5: v1(8.3,7.8) 8.372,7.728 IC2.4
  Top Layer w0.6: R45.1 C28.2 6.746,25.146 6.8,25.2 7.5,24.5 7.5,22.2 6.6,21.3 6.6,15.9 8.3,14.2 v1(8.3,11.4) 8.258,11.442 R12.2
  Bottom Layer w0.6: v1(8.3,7.8) v1(8.3,11.4)
IR_CONTROL: IC1.1 R34.2 | length 22.9
  Top Layer w0.3: -11.811,11.811 -11.938,11.938 -11.938,12.192 -10.922,11.176 -10.668,11.176
  Top Layer w0.45: IC1.1 -12.131,11.811 -11.811,11.811
  Top Layer w0.6: -11.811,11.811 -11.176,11.176 -7.724,11.176 -5.6,13.3 -5.6,20.1 -7,21.5 -7.9,21.5 -9.95,23.55 R34.2
NetC4_2: C4.2 IC1.7 XTAL1.2 | length 16.5
  Top Layer w0.45: IC1.7 -16.986,14.256 -13.716,17.526 -10.567,17.526 XTAL1.2
  Top Layer w0.5: C4.2 -10.668,22.225 -9.779,21.336 -9.779,18.314 XTAL1.2
NetC5_2: C5.2 IC1.8 XTAL1.1 | length 12.6
  Top Layer w0.45: XTAL1.1 -19.405,15.849 -17.786,14.23 IC1.8
  Top Layer w0.5: XTAL1.1 -19.177,18.516 -19.177,21.336 -18.288,22.225 C5.2
NetC13_2: C13.2 L3.1 USB1.1 | length 7.6
  Top Layer w0.6: L3.1 C13.2
  Top Layer w1: USB1.1 3.302,-1.143 3.683,-0.762 7.25,-0.762 L3.1
NetC16_2: C16.2 IC2.2 R39.1 | length 6.5
  Top Layer w0.45: R39.1 7.944,9.144 8.128,9.328 ; 7.428,9.328 8.185,9.328 IC2.2
NetC17_2: C17.2 IC2.1 R37.2 R38.1 | length 10.8
  Top Layer w0.45: C17.2 3.482,9.156 R38.1 3.494,9.694 3.928,10.128 IC2.1 10.795,10.218 R37.2
NetC21_1: C21.1 R40.1 USB1.5 | length 4.8
  Top Layer w0.45: C21.1 R40.1
  Top Layer w0.6: USB1.5@-1.778,6.83 USB1.5@-1.075,6.127 ; USB1.5@-1.078,6.83 C21.1
NetC22_2: C22.2 R41.2 XTAL2.2 | length 9.7
  Top Layer w0.45: R41.2 19.613,17.95 XTAL2.2
  Top Layer w0.5: C22.2 18.809,22.098 19.613,21.294 XTAL2.2
NetC23_2: C23.2 IC2.30 XTAL2.1 | length 13
  Top Layer w0.45: XTAL2.1 10.613,17.294 14.005,13.902 IC2.30
  Top Layer w0.5: XTAL2.1 10.597,18.304 10.597,21.31 11.385,22.098 C23.2
NetC24_2: C24.2 IC2.11 R43.2 | length 6
  Top Layer w0.45: R43.2 11.883,-1.972 C24.2 11.883,-0.182 13.208,1.143 13.544,1.143 14.005,1.604 IC2.11
NetC25_2: C25.2 IC2.12 R42.2 | length 5.6
  Top Layer w0.45: R42.2 13.177,-1.974 C25.2 13.177,-0.285 14.351,0.889 14.805,1.343 IC2.12
NetC29_1: C29.1 IC3.4 | length 2.7
  Top Layer w0.5: IC3.4 2.786,21.59 C29.1
NetC30_2: C30.2 IC2.15 R49.2 | length 4.9
  Top Layer w0.45: R49.2 17.217,-1.972 C30.2 17.205,-0.592 IC2.15
NetC31_2: C31.2 IC2.16 R48.2 | length 5.1
  Top Layer w0.45: IC2.16 18.005,0.791 18.511,0.285 C31.2 18.511,-1.908 R48.2
NetC34_1: C34.1 IC4.17 R54.1 | length 7.1
  Top Layer w0.35: IC4.17 24.36,-12.295 24.765,-12.7
  Top Layer w0.5: 24.765,-12.7 25.642,-13.577 R54.1 C34.1
NetC35_2: C35.2 IC5.27 | length 4.3
  Top Layer w0.45: IC5.27 5.899,-21.774 6.973,-22.848 7.62,-22.848 C35.2@8.382,-22.848
NetC38_2: C38.2 IC5.1 XTAL3.2 | length 10
  Top Layer w0.5: IC5.1 2.8,-14.726 XTAL3.2@6.246,-11.28 ; XTAL3.2 5.715,-11.43 7.112,-10.033 C38.2
NetC39_2: C39.2 IC5.2 XTAL3.1 | length 15.4
  Top Layer w0.45: C39.2 -7.112,-9.906 -5.588,-11.43 XTAL3.1 XTAL3.1@-1.972,-11.43 ; XTAL3.1@-4.064,-11.43 -1.143,-11.43 2,-14.573 IC5.2
NetCON1_1: CON1.1 R3.1 R4.2 | length 11.7
  Top Layer w0.45: CON1.1 -24.13,-9.271 -21.971,-7.112 -16.28,-7.112 R4.2 R3.1
NetCON1_2: CON1.2 Q1.3 R15.1 | length 33.8
  Top Layer w0.45: Q1.3@-18.288,-21.59 -14.605,-25.273 -14.605,-25.908 -14.224,-26.289 -12.573,-27.94 -12.319,-28.194 R15.1 ; Q1.3 Q1.3@-17.907,-21.59
  Bottom Layer w0.45: CON1.2 -25.527,-12.446 -26.162,-13.081 -26.162,-15.875 -25.4,-16.637 -21.717,-16.637 -17.553,-20.801 v1(-17.553,-22.733)
NetCON2_1: CON2.1 IC1.10 | length 4.9
  Top Layer w0.45: CON2.1 -23.59,9.366 IC1.10
NetCON2_2: CON2.2 IC1.9 | length 5.6
  Top Layer w0.45: CON2.2 -21.766,12.446 IC1.9
NetCON3_1: CON3.1 Q1.2 R24.1 | length 26.8
  Top Layer w0.45: R24.1 -28.448,-1.016 -26.924,-2.54 CON3.1 ; v1(-27.432,-10.287) -27.432,-17.025 v1(-21.917,-22.54) Q1.2
  Bottom Layer w0.45: v1(-27.432,-10.287) -27.432,-8.636 -26.67,-7.874 CON3.1
NetCON3_2: CON3.2 Q4.2 R21.1 | length 28.4
  Top Layer w0.45: R21.1 -27.432,0.762 CON3.2 ; v1(-21.917,-10.348) Q4.2
  Bottom Layer w0.45: CON3.2 -28.194,0 -28.829,-0.635 -28.829,-9.525 -28.829,-10.922 -28.067,-11.684 -26.797,-11.684 -26.035,-10.922 -26.035,-9.271 -26.035,-8.636 -25.4,-8.001 -23.114,-8.001 -21.917,-9.198 v1(-21.917,-10.348)
NetCON3_3: CON3.3 Q3.2 R22.1 | length 32.2
  Top Layer w0.45: R22.1 CON3.3 ; v1(-21.917,-18.476) Q3.2
  Bottom Layer w0.45: CON3.3 -28.194,2.54 -29.972,0.762 -29.972,-11.684 -27.432,-14.224 -27.432,-16.383 -25.339,-18.476 -24.384,-18.476 v1(-21.917,-18.476)
NetCON3_5: CON3.5 Q2.2 R23.1 | length 27.6
  Top Layer w0.45: R23.1 -28.321,-6.35 -27.305,-7.366 -23.622,-7.366 -22.479,-6.223 -22.479,-4.191 -22.479,-1.524 -24.003,0 CON3.5 ; v1(-21.917,-14.412) Q2.2
  Bottom Layer w0.45: v1(-22.606,-3.81) -22.606,-6.985 -20.701,-8.89 -20.701,-9.525 -20.701,-11.176 -20.792,-11.267 -21.917,-12.392 v1(-21.917,-14.412)
NetCON4_2: CON4.2 R26.1 | length 2
  Top Layer w0.5: CON4.2 R26.1
NetCON5_1: CON5.1 IC5.23 | length 15.6
  Top Layer w0.45: IC5.23 2,-23.019 v1(2.032,-22.987)
  Bottom Layer w0.6: v1(2.032,-22.987) 2.032,-25.132 3.3,-26.4 4.5,-26.4 8.294,-22.606 CON5.1 ; CON5.1@11.176,-21.717 CON5.1@11.176,-21.59
NetIC1_15: IC1.15 R7.1 | length 5.4
  Top Layer w0.45: R7.1 -21.844,4.445 -20.923,5.366 IC1.15
NetIC1_16: IC1.16 R6.1 | length 3.5
  Top Layer w0.45: R6.1 -20.32,4.318 -20.072,4.566 IC1.16
NetIC1_17: IC1.17 R5.1 | length 2
  Top Layer w0.45: R5.1 -18.046,1.766 -17.786,2.026 IC1.17
NetIC1_24: IC1.24 R16.1 | length 2.7
  Top Layer w0.45: IC1.24 -12.186,1.252 R16.1
NetIC1_28: IC1.28 R12.1 | length 24.4
  Top Layer w0.45: v1(-12.573,6.985) -12.554,6.966 IC1.28
  Top Layer w0.6: v1(-1,13.5) 6.046,13.5 6.146,13.4 R12.1
  Bottom Layer w0.6: v1(-12.573,6.985) -8.615,6.985 -5.2,10.4 -2.1,13.5 v1@-0.8,13.5
NetIC1_29: IC1.29 R1.1 R2.2 R4.1 | length 20.4
  Top Layer w0.45: R4.1 R2.2 R1.1 -13.45,-3.913 v1@-12.954,-3.417 ; IC1.29 -9.163,7.766 -8.636,7.239 -8.509,7.112 -8.509,3.683 -8.509,-1.397 v1(-8.89,-1.778)
  Bottom Layer w0.45: v1(-12.954,-3.798) -10.91,-3.798 -10.541,-3.429 v1(-8.89,-1.778)
NetIC1_31: IC1.31 R10.1 | length 17.1
  Top Layer w0.45: IC1.31 -8.096,9.366 -6.731,8.001 -6.731,3.81 -6.731,-4.203 R10.1
NetIC2_27: IC2.27 R37.1 | length 11.6
  Top Layer w0.45: v1@16.383,9.271 v1(16.405,9.293) IC2.27
  Top Layer w0.5: R37.1@10.668,12.939 10.633,12.904 10.795,13.066 v1(10.795,14.224)
  Bottom Layer w0.5: v1(10.795,14.224) 11.698,14.224 11.825,14.097 12.353,13.569 v1@16.434,9.488
NetIC2_29: IC2.29 R41.1 | length 3.2
  Top Layer w0.45: IC2.29 14.805,14.642 R41.1
NetIC3_5: IC3.5 R44.2 | length 2.3
  Top Layer w0.6: R44.2@-1.295,25.167 -1.295,23.771 IC3.5
NetIC4_22: IC4.22 R56.1 | length 11.5
  Top Layer w0.35: R56.1 14.23,-10.674 15.113,-11.557 15.113,-12.192 16.637,-13.716 20.574,-13.716 21.11,-13.18 IC4.22
NetIC4_23: IC4.23 R55.1 | length 12.8
  Top Layer w0.35: R55.1 12.147,-10.205 12.7,-9.652 14.986,-9.652 16.256,-10.922 16.256,-12.192 16.891,-12.827 20.193,-12.827 20.46,-12.56 IC4.23
NetIC5_13: IC5.13 R58.2 R60.1 | length 8.5
  Top Layer w0.45: IC5.13 -6.331,-20.974 -6.604,-20.701 -6.604,-16.891 -6.211,-16.498 R58.2
NetIC5_20: IC5.20 R61.2 | length 11.6
  Top Layer w0.45: v1(-8.128,-23.495) R61.2 ; v1(-1.143,-22.352) -1.143,-22.86 -0.4,-23.603 IC5.20
  Bottom Layer w0.6: v1(-8.128,-23.495) -2.286,-23.495 v1(-1.143,-22.352)
NetIC5_21: IC5.21 R62.2 | length 16.7
  Top Layer w0.45: v1(-9.652,-23.495) R62.2 ; IC5.21 0.4,-22.46 v1(0.508,-22.352)
  Bottom Layer w0.6: v1(-9.652,-23.495) -9.652,-24.257 -8.89,-25.019 -1.397,-25.019 0.508,-23.114 v1(0.508,-22.352)
NetIR-LED1_1: IR-LED1.1 IR-LED2.2 | length 22.9
  Top Layer w1.5: IR-LED1.1@14.07,38.191 cw(c0,0) IR-LED2.2@32.247,24.832
NetIR-LED1_2: IR-LED1.2 IR-LED3.2 IR-LED5.2 IR-LED7.2 IR-LED9.2 Q6.3 | length 223.7
  Top Layer w1: -9.4,32 -9.2,31.8 v1(-8.4,31.8) ; Q6.3 -9.293,30.893 v1(-10.2,31.8) ; v1(-10.2,31.8) v1(-9.3,32.7) v1(-8.4,31.8) ; v1(-10.2,31.8) -10.2,30.9 Q6.3@-9.3,30.9 ; v1(-10.2,31.8) Q6.3@-9.3,30.9 ; Q6.3@-9.3,30.9 v1(-8.4,31.8) ; Q6.3@-9.3,30.9 -8.4,30.9 v1(-8.4,31.8)
  Bottom Layer w1: v1(-10.2,32.7) v1(-10.2,31.8) v1(-8.4,31.8) v1(-9.3,32.7) ; 38,1.23 38,1.3
  Bottom Layer w1.5: IR-LED9.2 -31.487,21.278 ; IR-LED7.2 -30.2,-23.2 ; v1(-9.3,32.7) -9.3,36.8 ; -9.123,36.889 cw(c0,0) 37.976,1.356 ; -8.765,36.975 ccw(c0,0) 12.719,-35.808 ; 10.5,36.6 IR-LED1.2 ; 12.9,-35.8 IR-LED5.2 ; 38,1.23 IR-LED3.2
  other v1: -8.4,32.7
NetIR-LED2_1: IR-LED2.1 R28.1 | length 0.4
  Top Layer w1.2: 34.216,22.039 cw(c0,0) 34.43,21.704
NetIR-LED3_1: IR-LED3.1 IR-LED4.2 | length 22
  Top Layer w1.5: 34.239,-22.004 ccw(c0,0) IR-LED3.1@40.682,-1.211
NetIR-LED4_1: IR-LED4.1 R29.1 | length 1.1
  Top Layer w1.2: R29.1@31.308,-26.006 ccw(c0,0) IR-LED4.1@31.973,-25.184
NetIR-LED5_1: IR-LED5.1 IR-LED6.2 | length 23.1
  Top Layer w1.5: IR-LED6.2@-11.328,-39.092 ccw(c0,0) IR-LED5.1@11.415,-39.066
NetIR-LED6_1: IR-LED6.1 R30.1 | length 1.6
  Top Layer w1.2: R30.1@-15.204,-37.754 ccw(c0,0) IR-LED6.1@-13.705,-38.323
NetIR-LED7_1: IR-LED7.1 IR-LED8.2 | length 22.6
  Top Layer w1.5: IR-LED8.2@-40.675,-1.417 ccw(c0,0) IR-LED7.1@-33.817,-22.648
NetIR-LED8_1: IR-LED8.1 R31.1 | length 1.9
  Top Layer w1.2: IR-LED8.1@-40.68,1.271 cw(c0,0) R31.1@-40.573,3.214
NetIR-LED9_1: IR-LED9.1 IR-LED10.2 | length 22.8
  Top Layer w1.5: IR-LED9.1@-32.028,25.114 cw(c0,0) IR-LED10.2@-13.753,38.306
NetIR-LED10_1: IR-LED10.1 R32.1 | length 1.3
  Top Layer w1.2: IR-LED10.1@-11.181,39.134 cw(c0,0) -9.941,39.467
NetLED1_1: LED1.1 R8.1 | length 1.5
  Top Layer w0.45: LED1.1 R8.1
NetLED2_1: LED2.1 R9.1 | length 1.5
  Top Layer w0.45: LED2.1 R9.1
NetLED3_1: LED3.1 R17.2 | length 3.1
  Top Layer w0.45: R17.2 -28.575,-4.572 -27.305,-5.842 LED3.1
NetLED4_1: LED4.1 R27.1 | length 18.8
  Top Layer w0.45: R27.1 v1(-4.2,22.2)
  Top Layer w0.6: LED4.1 -0.762,32.762 0.1,31.9 v1(0.1,28.2)
  Bottom Layer w0.6: v1(-4.2,22.2) -0.6,25.8 0,26.4 v1@0,28.2
NetLED4_2: LED4.2 LED5.1 | length 110.8
  Top Layer w0.6: LED5.1@0.862,-36 v1(2.2,-36) ; LED4.2@1.038,36 v1(2.4,36)
  Bottom Layer w0.6: v1@2.395,35.92 cw(c0,0) v1@2.602,-35.906
NetLED6_2: LED6.2 R55.2 | length 1.5
  Top Layer w0.5: LED6.2 R55.2
NetLED7_2: LED7.2 R56.2 | length 1.5
  Top Layer w0.5: LED7.2 R56.2
NetLED8_1: LED8.1 R62.1 | length 1.3
  Top Layer w0.5: R62.1 LED8.1
NetLED9_1: LED9.1 R61.1 | length 1.3
  Top Layer w0.5: R61.1 LED9.1
NetQ1_1: Q1.1 Q2.1 Q3.1 Q4.1 R25.2 | length 32.4
  Top Layer w0.3: Q1.1 -19.624,-20.64 -19.431,-20.447 -19.431,-16.51 ; Q3.1 -20.538,-16.51 -19.431,-16.51 ; Q2.1 -20.538,-12.446 -19.431,-12.446 ; Q4.1 -20.254,-8.448 -19.431,-9.271 -19.431,-12.446 ; -19.431,-16.51 -19.431,-12.446
  Top Layer w0.5: R25.2 -28.194,-8.128 -27.686,-8.636 -26.543,-8.636 -26.162,-9.017 -26.162,-16.256 -25.842,-16.576 Q3.1
NetQ2_3: Q2.3 R7.2 R14.1 R20.1 | length 41.9
  Top Layer w0.45: R7.2 -21.844,-0.508 -21.336,-1.016 -21.336,-4.191 -20.701,-4.826 R20.1 ; -20.447,-4.826 v1@-19.939,-5.334 ; -19.939,-4.826 v1(-19.939,-5.588) v1@-19.939,-5.334 ; -19.431,-4.826 v1@-19.939,-5.334 ; Q2.3@-17.907,-13.462 Q2.3 -17.526,-14.19 -17.526,-14.478 -12.405,-19.599 ; -12.573,-19.685 -12.573,-25.146 -11.811,-25.908 -6.858,-25.908 -6.096,-25.146 R14.1
  Bottom Layer w0.45: v1(-19.939,-5.588) -18.669,-6.858 -18.669,-13.335 v1@-17.462,-14.541
  other v1: -17.426,-14.605
NetQ3_3: Q3.3 R6.2 R13.1 R19.1 | length 40.9
  Top Layer w0.45: v1(-17.426,-18.669) -13.362,-22.733 ; -13.462,-22.733 -13.462,-25.654 -12.319,-26.797 -5.703,-26.797 R13.1
  Top Layer w0.5: R6.2 -20.32,-2.667 -19.685,-3.302 R19.1 ; Q3.3 -17.426,-18.354 v1(-17.426,-18.669)
  Bottom Layer w0.5: v1(-19.939,-3.175) -21.336,-4.572 -21.336,-6.35 -19.685,-8.001 -19.685,-16.51 v1@-17.526,-18.669
NetQ4_3: Q4.3 R5.2 R11.1 R18.1 | length 31.2
  Top Layer w0.45: R5.2 -18.796,-1.766 R18.1 ; -14.859,-13.208 -14.859,-15.24 -11.176,-18.923 R11.1 ; -14.759,-13.208 v1(-17.426,-10.541) -17.426,-10.226 Q4.3 ; Q4.3 -17.907,-9.398 Q4.3
  Bottom Layer w0.45: -17.907,-1.524 v1(-18.796,-0.635) -17.426,-2.005 v1(-17.426,-10.541)
NetQ6_1: Q6.1 R34.1 R36.2 | length 3.2
  Top Layer w0.6: Q6.1 -10.238,27.122 R36.2 -10.038,25.562 R34.1
NetR38_2: R38.2 USB1.3 | length 9.1
  Top Layer w0.5: USB1.3 0.507,3.429 1.778,3.429 2.794,4.445 3.494,5.145 R38.2
NetR39_2: R39.2 USB1.2 | length 7.7
  Top Layer w0.5: USB1.2 4.064,3.786 4.064,3.81 4.318,4.064 5.018,4.764 R39.2
PROGRAMMER_RESET: IC5.24 R3.2 R16.2 R57.2 R59.1 | length 58.6
  Top Layer w0.45: v1@-16.383,-25.654 -12.7,-29.337 -2.537,-29.337 -0.9,-27.7 1.764,-27.7 2.8,-26.664 ; R3.2 -12.331,-5.08 -12.446,-5.195 ; v1(-12.446,-7.112) -12.446,-5.195 ; R16.2@-11.303,-1.131 R16.2 -11.43,-4.179 -12.446,-5.195 ; IC5.24@2.8,-25.914 IC5.24 2.8,-26.664 ; R59.1@8.128,-26.15 7.874,-26.404 7.366,-26.404 3.06,-26.404 2.8,-26.664
  Bottom Layer w0.45: v1(-16.383,-25.527) -16.129,-25.273 -16.129,-13.97 -12.446,-10.287 v1(-12.446,-7.112)
RESET_FTDI: IC1.25 IC4.19 | length 89.2
  Top Layer w0.35: v1@23.06,-13.462 IC4.19
  Top Layer w0.45: v1(-13.081,-12.954) -11.176,-11.049 -11.176,-5.969 -10.16,-4.953 -10.16,1.803 -10.167,1.81 -10.167,4.311 -10.16,4.318 ; IC1.25 -9.785,4.566 IC1.25@-9.779,4.56
  Top Layer w0.5: v1(-2.6,-31.1) 1.3,-31.1 2.2,-32 10,-32 12.409,-29.591 14.224,-29.591 21.4,-22.415 v1(21.4,-21.8)
  Bottom Layer w0.5: v1(-13.081,-12.954) -14.986,-14.859 -14.986,-26.67 -10.795,-30.861 -2.839,-30.861 v1(-2.6,-31.1) ; v1(21.4,-21.8) 22.6,-21.8 23.749,-20.651 23.749,-14.351 v1(23.241,-13.843)
RX_FTDI: IC4.5 R10.2 R26.2 R52.1 | length 68.1
  Top Layer w0.3: R52.1 19.81,-20.564 IC4.5
  Top Layer w0.5: v1@-10.414,-14.351 -9.017,-12.954 -9.017,-6.985 -8.116,-6.084 R10.2 ; v1(-1,-29.8) 1.65,-29.8 2.7,-30.85 9.15,-30.85 11.164,-28.836 R26.2 ; R26.2@11.418,-28.448 13.589,-28.448 19.8,-22.237 R52.1
  Bottom Layer w0.5: v1(-10.414,-14.224) -12.319,-14.224 -13.97,-15.875 -13.97,-26.162 -10.414,-29.718 v1@-1.2,-29.718
TX_FTDI: IC1.30 IC4.1 R53.1 | length 85
  Top Layer w0.3: R53.1@12.147,-18.624 12.147,-19.306 12.657,-19.816 17.149,-19.816 17.21,-19.755 IC4.1
  Top Layer w0.45: v1@-11.811,-15.494 -11.811,-13.589 -10.033,-11.811 -10.033,-6.604 -8.382,-4.953 -8.382,-3.429 -7.62,-2.667 -7.62,7.493 -8.693,8.566 IC1.30
  Top Layer w0.5: v1@-11.811,-15.494 v1(-11.684,-15.621) ; v1(15.748,-23.876) 17.018,-22.606 17.018,-19.947
  Bottom Layer w0.5: v1(-11.684,-15.621) -12.827,-16.764 -12.827,-25.781 -12.446,-26.162 -10.287,-28.321 0.635,-28.321 2.914,-30.6 8.3,-30.6 8.9,-30.6 12,-27.5 12.9,-27.5 15.748,-24.652 v1(15.748,-23.876)
V_FILTERED: C1.1 C2.1 C3.2 IC1.4 IC1.6 IC1.18 IC1.20 L1.1 R2.1 R18.2 R19.2 R20.2 | length 56.5
  Top Layer w0.45: R20.2 R18.2 -17.284,-1.536 -16.924,-1.176 ; -16.986,0.7 -16.921,0.635 C2.1@-15.851,0.635 ; -16.51,5.461 -16.986,4.985 -16.986,4.477 ; v1@-16.186,9.906 -16.51,9.582 -16.51,4.953 ; -16.129,4.953 -16.186,5.01 ; R2.1 -15.736,-2.401 C2.1 C2.1@-15.851,0.635 ; C3.2@-15.736,-0.889 -15.863,-1.016 -16.764,-1.016 -16.924,-1.176 ; C1.1 -14.974,14.617 -14.097,15.494 -12.573,15.494 ; IC1.4 -14.586,13.484 -14.859,13.757 -15.961,13.757 -16.186,13.532 IC1.6 -16.186,5.461 ; -12.319,15.494 -12.573,15.494 ; L1.1 -11.695,15.494 -12.573,15.494 ; -16.986,4.477 IC1.18 -16.986,-1.176 -16.924,-1.176 ; -16.986,4.477 -16.51,4.953 ; -16.51,4.953 -15.748,4.953 -15.367,4.572 ; -16.51,4.953 -16.453,5.01 -16.186,5.01 ; -16.186,5.01 -16.186,5.461 ; -16.186,5.461 -15.367,4.642 -15.367,4.572 ; C2.1@-15.851,0.635 -15.386,1.1 IC1.20 -15.367,2.885 -15.367,4.572
  Top Layer w0.7: L1.1 -10.287,14.086 v1(-10.287,12.573)
  Bottom Layer w0.7: v1@-16.637,9.485 v1(-16.637,9.525) -13.589,12.573 v1(-10.287,12.573)
V_IR: C8.1 C9.2 C10.2 C11.2 C12.2 C40.2 C41.2 L2.2 R28.2 R29.2 R30.2 R31.2 R32.2 | length 224.1
  Top Layer w0.6: C9.2 -3.416,26.694 L2.2@-3.416,26.9
  Top Layer w1: R31.2 C12.2@-37.211,4.498 ; R30.2@-16.992,-37.025 -16.59,-36.148 ; C11.2@-15.809,-33.791 -16.2,-35.3 -16.59,-36.148 ; C11.2 -16.59,-36.148 ; R32.2@-7.853,39.966 C41.2@-7.3,37.4 ; C40.2 R29.2 ; C10.2 R28.2
  Top Layer w1.5: C11.2@-15.808,-34.556 cw(c0,0) -2.842,37.894 ; L2.2@-3.302,27.014 -3.302,37.8 ; -3.098,37.874 cw(c0,0) C40.2@27.903,-25.795
V_KILOBOT: C6.1 CON3.4 R17.1 R21.2 R22.2 R23.2 R24.2 R25.1 | length 19.3
  Top Layer w0.6: R25.1 R23.2 -30.48,-6.338 -30.48,3.683 -29.972,4.191 -27.813,4.191 -25.4,4.191 -24.13,2.921 CON3.4
V_USB: C7.1 C14.1 C15.2 C32.1 C33.2 C36.1 C37.2 IC3.1 IC3.3 IC4.4 IC4.20 IC5.4 IC5.31 IC5.32 L1.2 L2.1 L3.2 LED6.1 LED7.1 R52.2 R53.2 R57.1 R58.1 | length 190.2
  Top Layer w0.3: 21.717,-14.097 21.885,-13.929 21.885,-13.548
  Top Layer w0.35: 16.764,-15.621 18.669,-15.621 ; R52.2 18.3,-20.181 19.16,-19.321 IC4.4 19.16,-16.112 ; 22.098,-12.7 22.41,-12.388 IC4.20 C32.1@22.41,-8.5 ; 18.669,-15.621 19.187,-15.621 19.187,-16.085 19.16,-16.112 ; 18.669,-15.621 19.16,-16.112
  Top Layer w0.45: R58.1 -3.417,-14.097 0,-14.097 0.4,-14.497 IC5.4 0.4,-19.069 0.889,-19.558 2.286,-19.558 3.27,-18.574 IC5.31 ; IC3.1@-0.721,20.099 -0.721,18.921 -0.4,18.6 0.9,18.6 1.151,18.851 1.151,20.071 IC3.3 ; v1@4.318,-24.904 5.449,-24.904 R57.1@5.588,-24.765 ; IC5.32 v1@6.09,-17.774 ; C37.2@4.572,-16.752 C36.1@6.35,-16.752 ; v1(5.461,-16.764) 5.207,-17.018 5.207,-18.542 5.175,-18.574 IC5.31 ; v1(6.223,-17.907) v1@6.09,-17.774 ; IC5.31 5.937,-18.574 6.09,-18.421 v1@6.09,-17.774
  Top Layer w0.5: 18.923,-15.621 19.812,-15.621 22.098,-13.335 22.098,-12.7
  Top Layer w0.6: v1(6.223,-17.907) 6.223,-16.879 C36.1@6.35,-16.752 ; R53.2@12.147,-17.124 LED6.1 ; v1@12.192,-16.383 12.312,-16.263 15.36,-16.263 16.002,-15.621 19.187,-15.621 ; LED7.1 13.671,-16.985 C33.2@13.716,-17.03 ; 16.764,-15.621 19.187,-15.621 ; 21.717,-14.097 20.193,-15.621 19.187,-15.621
  Top Layer w0.7: C7.1 -0.4,16.852 -0.4,18.3 0.6,18.3
  Top Layer w0.8: v1(-2.6,14.9) v1@-2.5,15
  Top Layer w1: v1(-8.2,12.8) v1(-8.2,15.4) ; L1.2@-8.2,14 -8.1,14.1 v1(-7.1,14.1) ; L2.1 -3.302,24.002 -2.6,23.3 -2.6,12.9 -4.2,11.3 -4.2,8.5 -4.953,7.747 -4.953,4.826 -4.445,4.318 -4.445,-2.032 -3.302,-3.175 4.318,-3.175 4.815,-2.678 L3.2 7.366,-5.334 v1(6.985,-5.715) v1(8.382,-5.715) 7.366,-4.699 7.366,-4.318 ; v1(-2.6,14.9) -2.504,14.9 C7.1@-1.402,16.002 ; v1(-2.6,17.2) C7.1@-1.402,16.002 ; C7.1 C7.1@-1.402,16.002
  Bottom Layer w0.6: v1@4.318,-24.904 4.318,-24.77 5.588,-23.5 5.588,-18.542 ; 5.588,-19.431 5.715,-19.558 5.715,-18.415 v1(6.223,-17.907) 5.588,-18.542 ; v1@6.223,-17.526 v1(5.461,-16.764) ; 6.223,-16.764 v1(5.461,-16.764) ; v1@11.811,-16.383 v1@13.689,-16.383 ; v1(5.461,-16.764) 5.588,-16.891 5.588,-18.542
  Bottom Layer w1: v1(-7.1,14.1) -8.2,15.2 v1(-8.2,15.4) ; -6.8,15.4 -8.2,14 v1(-8.2,12.8) ; -3.5,15.4 -2.6,16.3 v1(-2.6,14.9) ; v1(6.223,-17.907) 6.223,-16.891 8.636,-14.478 ; 8.636,-7.239 7.112,-5.715 v1(6.985,-5.715) v1(8.382,-5.715) 8.382,-6.096 8.636,-6.35 8.636,-14.478 ; v1(13.689,-16.34) 10.498,-16.34 8.636,-14.478 ; v1(-8.2,12.8) v1(-8.2,15.4) ; v1(-8.2,12.8) -6.1,14.9 v1(-2.6,14.9) ; v1(-8.2,15.4) -4.4,15.4 v1(-2.6,17.2) ; v1(-2.6,14.9) v1(-2.6,17.2) ; v1(-2.6,14.9) -2.352,14.9 C7.1 -1.402,16.002 v1(-2.6,17.2)
  other v1: 4.1,-24.9 12.192,-16.34 -2.6,16.1
VL_CONTROL: IC1.32 R27.2 | length 12.2
  Top Layer w0.45: IC1.32 -7.234,10.166 -4.164,13.236 -4.164,17 -4.164,17.756 R27.2
pads on no net: CON1.3 IC1.2 IC1.11 IC1.12 IC1.19 IC1.22 IC1.23 IC1.26 IC1.27 IC1.33 IC2.5 IC2.9 IC2.13 IC2.17 IC2.32 IC2.33 IC4.2 IC4.3 IC4.6 IC4.8 IC4.9 IC4.10 IC4.11 IC4.12 IC4.13 IC4.14 IC4.24 IC4.27 IC4.28 IC5.5 IC5.6 IC5.7 IC5.8 IC5.9 IC5.10 IC5.11 IC5.12 IC5.14 IC5.19 IC5.22 IC5.25 IC5.26 IC5.33

## Polygon pours and split planes (outlines as drawn)
GND on Top Layer "Top Layer-GND" (solid, remove dead copper, pour order 1000): -44.759,50.521 -44.759,-44.679 44.241,-44.679 44.441,-44.679 44.441,50.321
GND on Bottom Layer "Bottom Layer-GND" (solid, remove dead copper, pour order 1001): -44.7,50.5 -44.7,-44.7 44.3,-44.7 44.5,-44.7 44.5,50.3

## Keep-outs
Keep-Out Layer:
  circle w0.2: c0,0 r43
  rectangle: 15.6,122.1 26.6,126.5
  rectangle: 0.6,92.4 11.4,96.8
  rectangle: -14,122.1 -3.2,126.5
  lines w1.5: 20.564,67.995 ccw(c6,106) 35.52,77.981
  text "Keep-out traces for limiting the gnd" at 45.4,106.9 h4
  text "under the crystals and at the edge of the board" at 45.4,100.5 h4

## Other copper
Top Layer:
  text "Controller V1.0: Top layer" at -45.2,177.8 h4
Bottom Layer:
  text "Controller V1.0: Bottom layer" at -45.2,170.3 h4

## Silkscreen, mask and mechanical layers (free items; w line width, h text height)
Top Overlay:
  lines w0.2: -0.635,0 0.635,0 ; 0,-0.635 0,0.635
  text "Controller V1.0: Top overlayer" at -45.2,185.3 h4
  text "GND" at -28.6,14.4 h1
  text "PD5" at -28.6,11.9 h1
  text "PD6" at -28.6,9.4 h1
  text "Kilobot Controller" at 30.4,-9.3 h2.5 r90
  text "SSR - Harvard - v1.0" at 32.8,-9.3 h2.5 r90
  text "CTA" at 35.1,-9.3 h2.5 r90
  text "INTERNAL" at -34.1,-10.5 h1
  text "PROG" at -34,-11.9 h1
  text "EXTERNAL" at -34,-14.1 h1
  text "PROG" at -34,-15.6 h1
  text "CLK" at 11.684,-27.178 h1 r90
  text "GND" at 14.224,-27.178 h1 r90
  text "GND" at 5.5,-32.9 h1 r90
  text "RX" at 8.2,-32.9 h1 r90
Bottom Overlay:
  circle w0.2: c0,0 r43
Top Solder:
  text "Controller V1.0: Top solder" at -45.2,162.8 h4
Bottom Solder:
  text "Controller V1.0: Bottom solder" at -45.2,155.3 h4
Mechanical 1:
  circle w0.2: c0,0 r43
  text "Controller V1.0: Outline" at -45.2,147.8 h4
Mechanical 15:
  circle w0.254: c0,0 r40.754
  lines w0.2: -50,0 0,0 ; -46.602,15.142 0,0 ; -40.451,-29.389 0,0 ; -40.451,29.389 0,0 ; -27.4,-40.623 0,0 ; -15.451,-47.553 0,0 ; -15.451,47.553 0,0 ; 0,49 0,0 ; 15.451,-47.553 0,0 ; 15.451,47.553 0,0 ; 28.801,-39.642 0,0 ; 40.451,-29.389 0,0 ; 40.451,29.389 0,0 ; 46.602,15.142 0,0 ; 50,0 0,0
  lines w0.254: -50,0 cw(c0,0) -40.451,29.389 ; -49,0 cw(c0,0) -46.603,15.139 ; -40.451,-29.389 ccw(c0,0) -15.451,-47.553 ; -27.4,-40.623 ccw(c0,0) -15.142,-46.602 ; -15.451,47.553 cw(c0,0) 15.451,47.553 ; -15.142,46.602 cw(c0,0) 0,49 ; 15.142,-46.602 ccw(c0,0) 28.801,-39.642 ; 15.451,-47.553 ccw(c0,0) 40.451,-29.389 ; 40.451,29.389 cw(c0,0) 50,0 ; 46.602,15.142 cw(c0,0) 49,0